# Altium PCB RPi_DAQ_Hat.PcbDoc
Units mm, origin at the board's own origin, x right, y up, seen from the top; angles counter-clockwise.
Board outline 56.5 x 65 mm, 2 copper layers (Top Layer, Bottom Layer); 27 components, 24 nets, 221 pads, 25 vias.
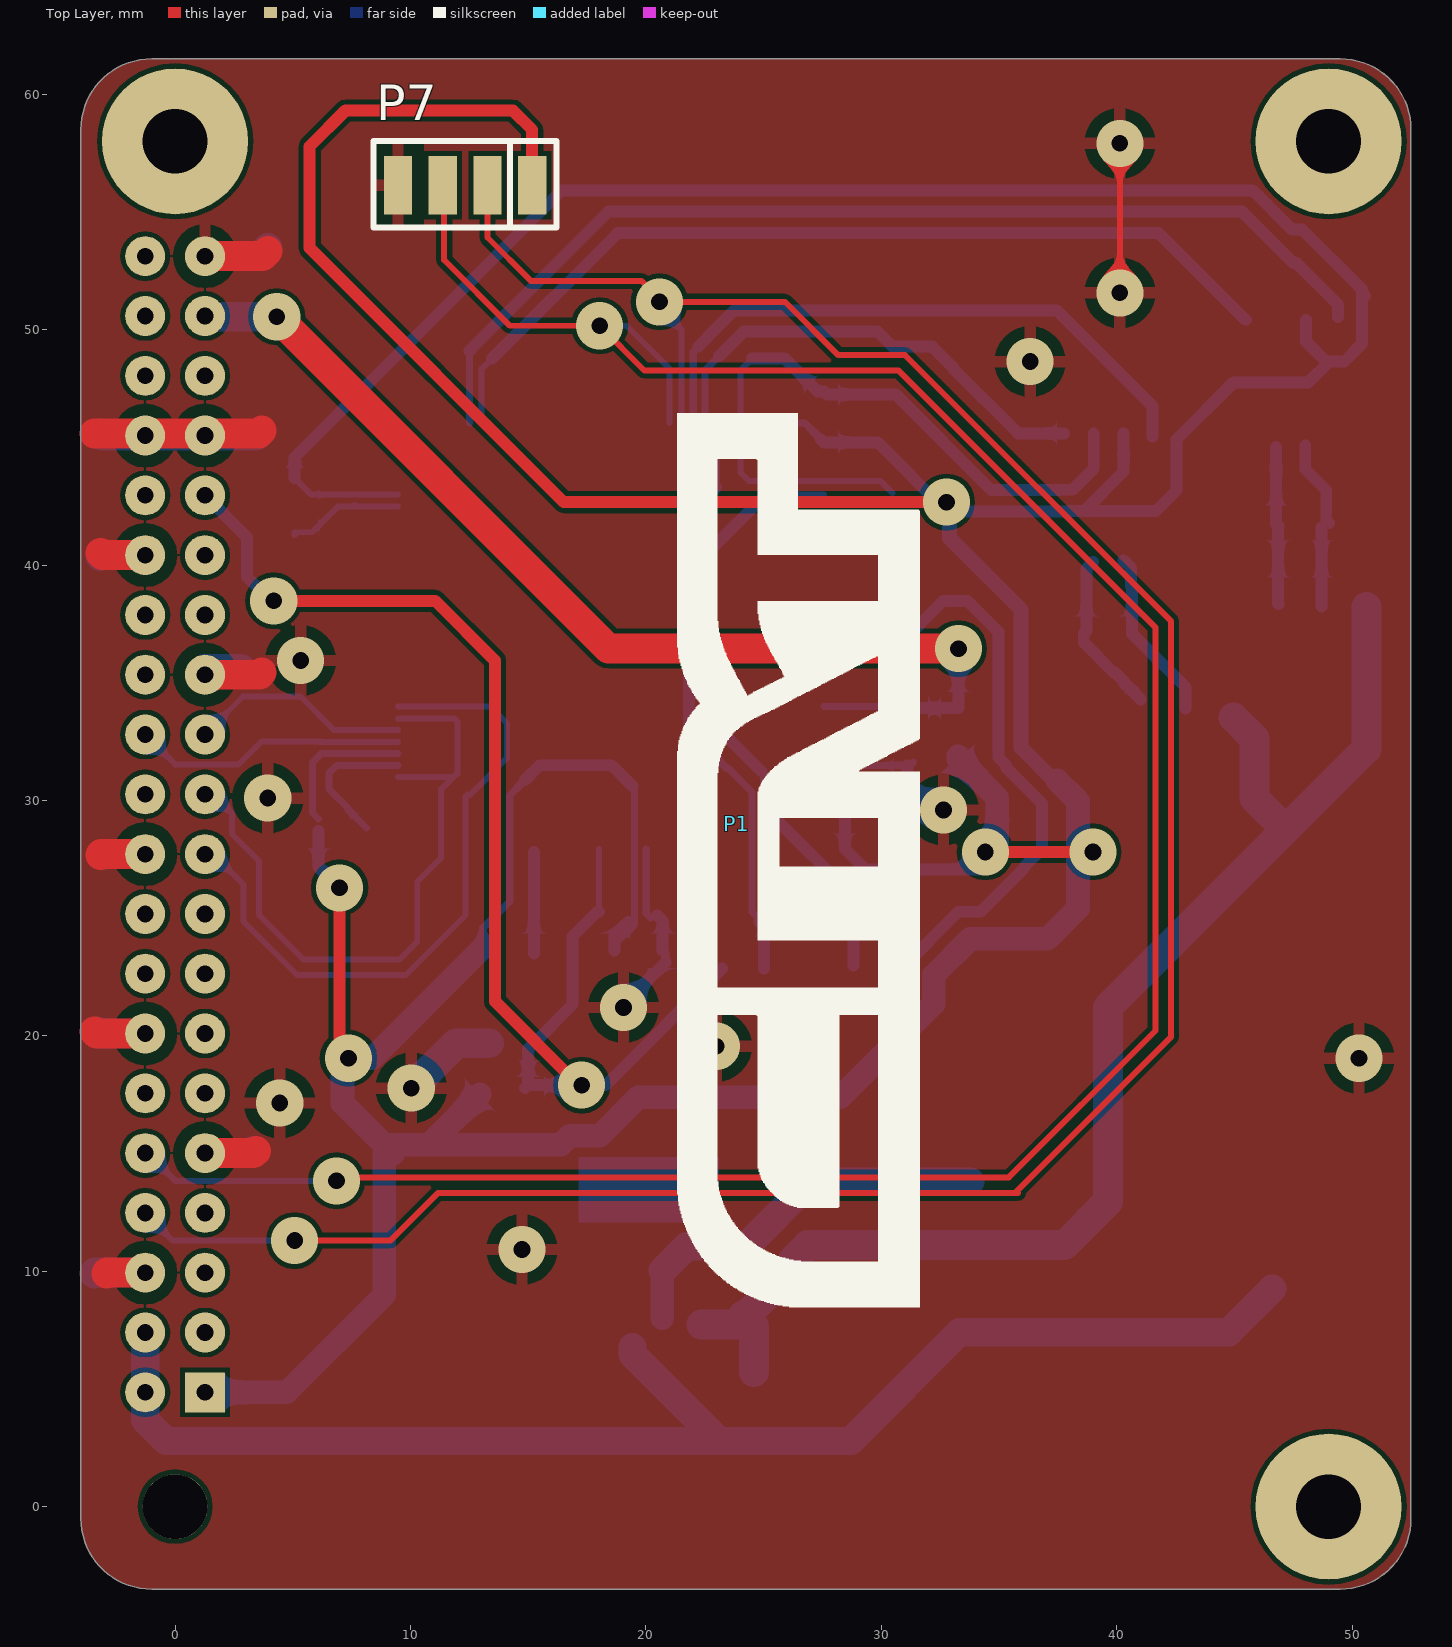
[diagram p0: Top Layer view]
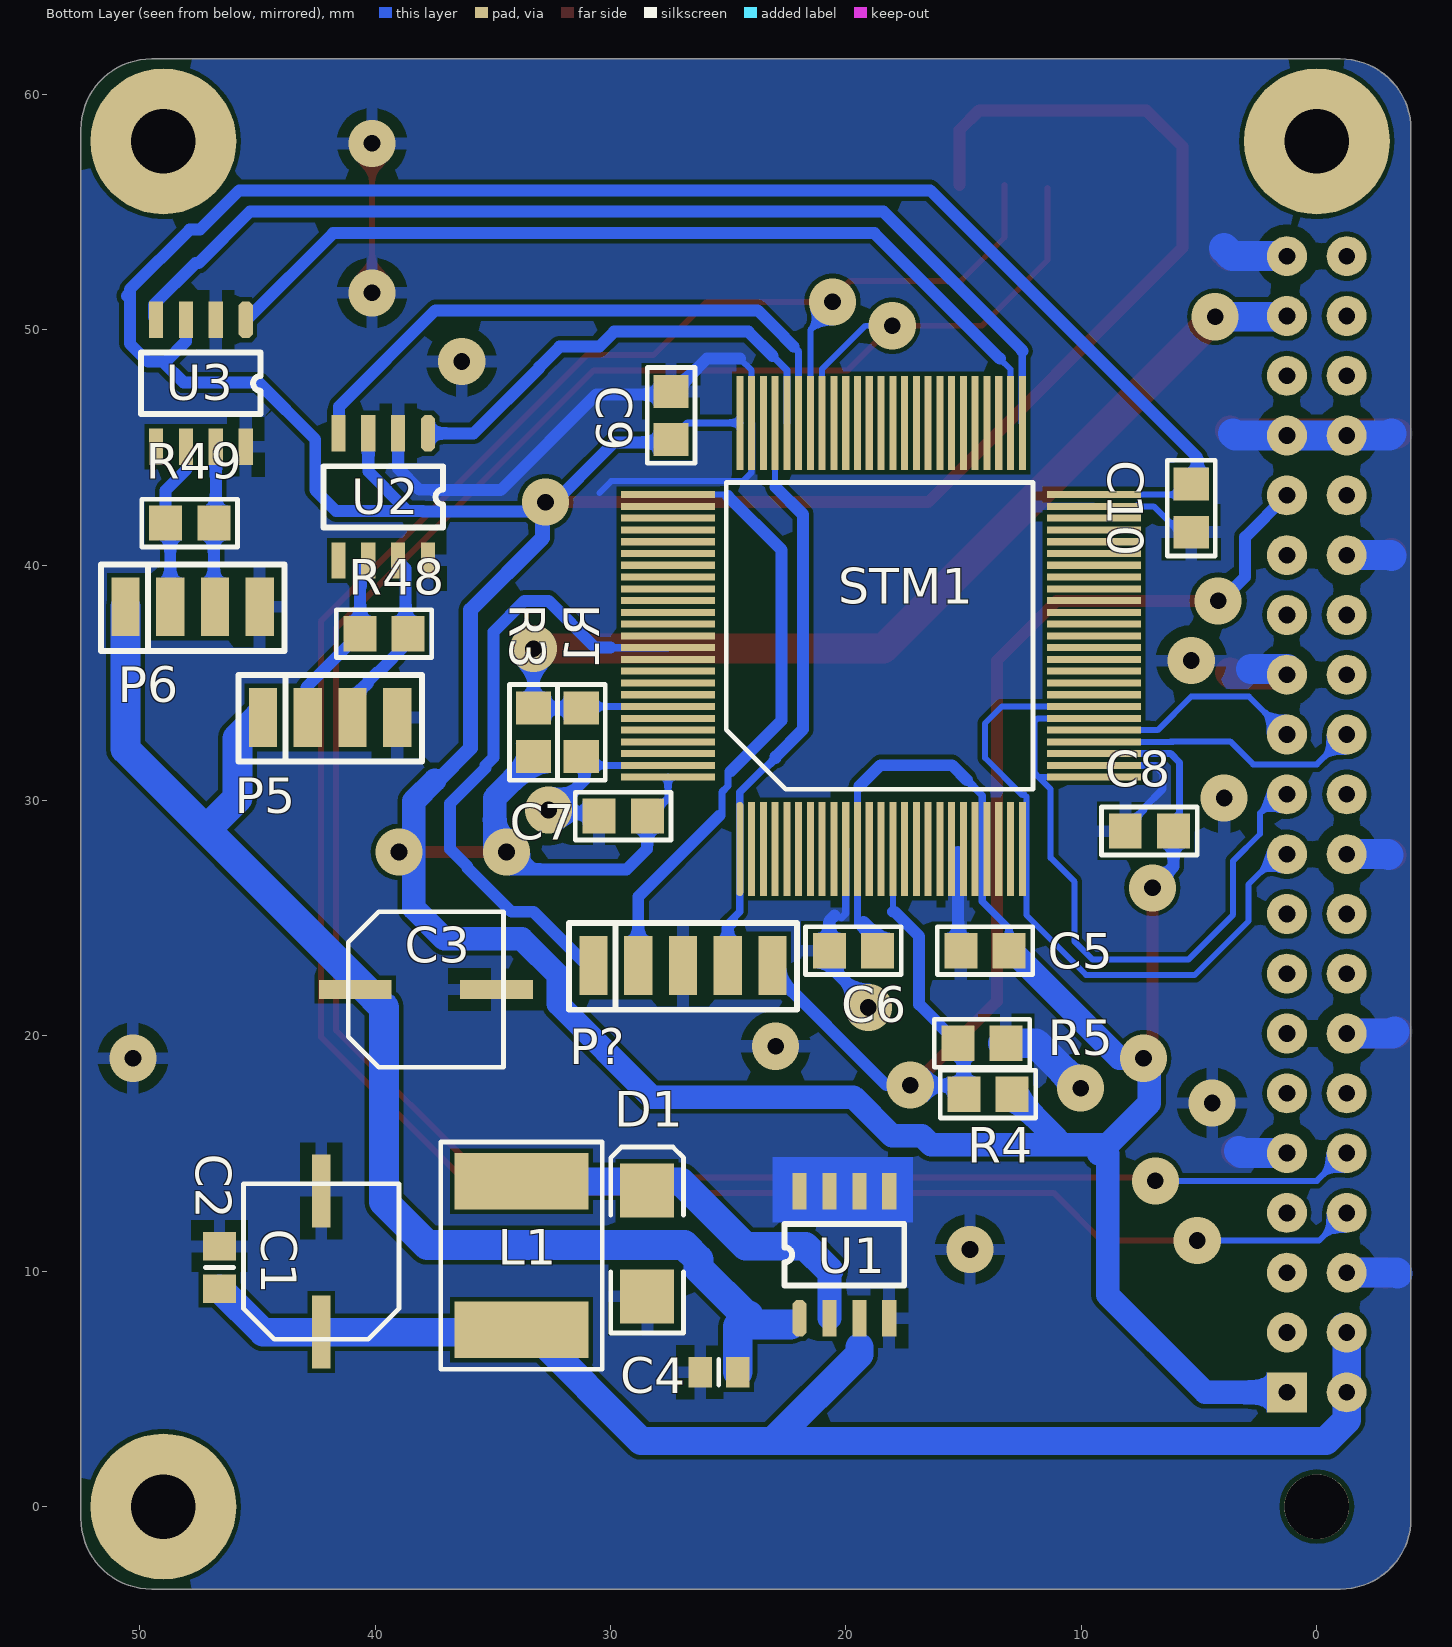
[diagram p1: Bottom Layer view, seen from below]

## Layer stack, top to bottom
Top Solder: solder mask 0.0102, Solder Resist, Dk 3.5
Top Layer: signal copper 0.0356
Dielectric 1: dielectric 0.32, FR-4, Dk 4.8
Bottom Layer: signal copper 0.0356
Bottom Solder: solder mask 0.0102, Solder Resist, Dk 3.5

## Board outline
-4,-0.5 ccw(c-1,-0.5) -1,-3.5 49.5,-3.5 ccw(c49.5,-0.5) 52.5,-0.5 52.5,58.5 ccw(c49.5,58.5) 49.5,61.5 -1,61.5 ccw(c-1,58.5) -4,58.5

## Design rules (kind name [scope] priority, off if disabled: settings)
Clearance Clearance_2 [OnLayer('Bottom Layer')] p1: gap=0.2
Clearance Clearance_1 [IsNamedPolygon('TOP_GND2') vs OnLayer('Top Layer')] p2: gap=0.2
Clearance [Not IsNamedPolygon('TOP_GND2')] p3: gap=0.2
HoleSize [All] p1: absolutevalues=TRUE maxlimit=1000 minlimit=0.025 maxpercent=80.000 minpercent=20.000
MinimumSolderMaskSliver [All] p1 off: minsoldermaskwidth=0.254
PasteMaskExpansion [All] p1 off: expansion=0
PolygonConnect [All] p1: connectstyle=Relief reliefconductorwidth=0.5 reliefentries=4 polygonreliefangle="90 Angle" airgapwidth=0.5
PolygonConnect PolygonConnect_1 [InNamedPolygon('GND-TOP')] p2: connectstyle=Direct reliefconductorwidth=0.254 reliefentries=4 polygonreliefangle="90 Angle" airgapwidth=0.254
RoutingVias [All] p1: holewidth=0.711 width=3 viastyle="Through Hole" minholewidth=0.711 minwidth=2 maxholewidth=0.711 maxwidth=5
SilkToSilkClearance [All] p1 off: silktosilkclearance=0.254
SilkToSolderMaskClearance [IsPad] p1 off: minsilkscreentomaskgap=0.254 clearancetoexposedcopper=TRUE
SolderMaskExpansion [All] p1 off: expansion=0.102
Width [All] p1: maxlimit=100 minlimit=0.254 preferedwidth=0.5
25 further rules are at their usual default settings.

## Classes and differential pairs
component class RPi_DAQ_Hat_MCU: C5 C6 C7 C8 C9 C10 R1 R3 R4 R5 R48 R49 STM1 STM32F107xx U2 U3
component class RPi_DAQ_Hat_Connections: C1 C2 C3 C4 D1 L1 P1 P5 P6 P7 P? U1

## Components (designator, comment, footprint, x,y, rotation, side; value= is the part's Value field where it differs from the comment)
C1 "220uF" "SMD Capacitor 220uF 16V" 42.291,10.414 r0 bottom
C2 "100nF" 6-0805_N 46.609,10.16 r270 bottom
C3 "220uF" "SMD Capacitor 220uF 16V" 37.846,21.971 r90 bottom
C4 "100nF" 6-0805_L 25.4,5.715 r180 bottom
C5 "0.1uF" R0805 14.097,23.622 r0 bottom
C6 "0.1uF" R0805 19.685,23.622 r0 bottom
C7 "0.1uF" R0805 29.464,29.337 r0 bottom
C8 "0.1uF" R0805 7.112,28.702 r0 bottom
C9 "0.1uF" R0805 27.432,46.355 r90 bottom
C10 "0.1uF" R0805 5.334,42.418 r270 bottom
D1 "D Schottky" Diode 28.448,11.176 r270 bottom
L1 "47mH" Inductor 33.782,10.668 r90 bottom
P1 "Raspberry Pi 3" "Rasberry Pi 3 Hat" 23.865,29 r90 top
P5 "Header 2X2H" "SMD 4Wire" 41.91,33.528 r270 bottom
P6 "Header 2X2H" "SMD 4Wire" 47.752,38.227 r270 bottom
P7 "Header 2X2H" "SMD 4Wire" 12.319,56.134 r90 top
P? "ST-Link" "SMD 5Wire" 26.924,22.987 r270 bottom
R1 "10k" R0805 31.242,32.893 r90 bottom
R3 "DNP" R0805 33.274,32.893 r270 bottom
R4 "10k" R0805 13.97,17.526 r180 bottom
R5 "DNP" R0805 14.224,19.685 r0 bottom
R48 "Res3" R0805 39.624,37.084 r180 bottom
R49 "Res3" R0805 47.879,41.783 r180 bottom
STM1 "STM32F107xx" LQFP100 24.511,27.94 r180 bottom locked
U1 "AP1509 - 5V" SOP8 21.971,8.001 r270 bottom
U2 "CAN TRANCEIVER" SOP8 37.753,45.593 r90 bottom
U3 "CAN TRANCEIVER" SOP8 45.5,50.419 r90 bottom

## Footprints (in the part's own frame and the unit in brackets; to place one, negate y for a bottom-side part, rotate by r counter-clockwise, add the part's x,y. Pads: shape width x height; smd on the part's side, far side on the other; paste and mask are expansions set on the pad)
6-0805_L [mm] "Chip Resistor, Body 2.0x1.2mm, IPC High Density"
  rect 1x1.3 smd: 1(-0.8,0) 2(0.8,0)
  silkscreen extent 0,-0.55 0,0.55, body extent -1.07,-0.7 1.07,0.7, height 0.7
6-0805_N [mm] "Chip Resistor, Body 2.0x1.2mm, IPC Medium Density"
  rect 1.2x1.4 smd: 1(-0.9,0) 2(0.9,0)
  silkscreen extent 0,-0.6 0,0.6, body extent -1.07,-0.7 1.07,0.7, height 0.7
Diode [mm] "DO-214-AA/SMB; 2 C-Bend Leads; Body 5.3 x 3.6 mm, inc. leads (LxW)"
  rect 2.3x2.3 smd: 1(2.25,0) 2(-2.25,0)
  silkscreen extent -4.1,-1.55 3.8,1.55, body extent -2.54,-1.02 2.54,1.02, height 2
Inductor [mm]
  rect 2.4x5.7 smd: 1(3.15,0) 2(-3.15,0)
  silkscreen extent -4.83,-3.43 4.83,3.43, body extent -3.15,-3.15 3.15,3.15, height 4.5
LQFP100 [mm]
  oval 0.3x4 smd: 1(0,0)
  rect 0.3x4 smd: 2(0.5,0) 3(1,0) 4(1.5,0) 5(2,0) 6(2.5,0) 7(3,0) 8(3.5,0) 9(4,0) 10(4.5,0) 11(5,0) 12(5.5,0) 13(6,0) 14(6.5,0) 15(7,0) 16(7.5,0) 17(8,0) 18(8.5,0) 19(9,0) 20(9.5,0) 21(10,0) 22(10.5,0) 23(11,0) 24(11.5,0) 25(12,0) 51(12,18.1) 52(11.5,18.1) 53(11,18.1) 54(10.5,18.1) 55(10,18.1) 56(9.5,18.1) 57(9,18.1) 58(8.5,18.1) 59(8,18.1) 60(7.5,18.1) 61(7,18.1) 62(6.5,18.1) 63(6,18.1) 64(5.5,18.1) 65(5,18.1) 66(4.5,18.1) 67(4,18.1) 68(3.5,18.1) 69(3,18.1) 70(2.5,18.1) 71(2,18.1) 72(1.5,18.1) 73(1,18.1) 74(0.5,18.1) 75(0,18.1)
  rect 4x0.3 smd: 26(15.05,3.05) 27(15.05,3.55) 28(15.05,4.05) 29(15.05,4.55) 30(15.05,5.05) 31(15.05,5.55) 32(15.05,6.05) 33(15.05,6.55) 34(15.05,7.05) 35(15.05,7.55) 36(15.05,8.05) 37(15.05,8.55) 38(15.05,9.05) 39(15.05,9.55) 40(15.05,10.05) 41(15.05,10.55) 42(15.05,11.05) 43(15.05,11.55) 44(15.05,12.05) 45(15.05,12.55) 46(15.05,13.05) 47(15.05,13.55) 48(15.05,14.05) 49(15.05,14.55) 50(15.05,15.05) 76(-3.05,15.05) 77(-3.05,14.55) 78(-3.05,14.05) 79(-3.05,13.55) 80(-3.05,13.05) 81(-3.05,12.55) 82(-3.05,12.05) 83(-3.05,11.55) 84(-3.05,11.05) 85(-3.05,10.55) 86(-3.05,10.05) 87(-3.05,9.55) 88(-3.05,9.05) 89(-3.05,8.55) 90(-3.05,8.05) 91(-3.05,7.55) 92(-3.05,7.05) 93(-3.05,6.55) 94(-3.05,6.05) 95(-3.05,5.55) 96(-3.05,5.05) 97(-3.05,4.55) 98(-3.05,4.05) 99(-3.05,3.55) 100(-3.05,3.05)
  silkscreen extent -0.58,2.53 12.45,15.56, body extent -1.9,1.14 13.97,16.76, height 2
R0805 [mm]
  rect 1.4x1.5 smd: 1(-1.025,0) 2(1.025,0)
  silkscreen extent -2.03,-1.02 2.03,1.02, body extent -1.4,-0.76 1.4,0.76, height 1
"Rasberry Pi 3 Hat" [mm]
  round 6.2 hole 2.75: 0(-29,-25.135) 0(29,-25.135) 0(29,23.865)
  round 2.75 hole 2.75 unplated: 0(-29,23.865)
  rect 1.7x1.7 hole 0.71: 1(-24.14,22.595)
  round 1.7 hole 0.71: 2(-24.14,25.135) 3(-21.6,22.595) 4(-21.6,25.135) 5(-19.06,22.595) 6(-19.06,25.135) 7(-16.52,22.595) 8(-16.52,25.135) 9(-13.98,22.595) 10(-13.98,25.135) 11(-11.44,22.595) 12(-11.44,25.135) 13(-8.9,22.595) 14(-8.9,25.135) 15(-6.36,22.595) 16(-6.36,25.135) 17(-3.82,22.595) 18(-3.82,25.135) 19(-1.28,22.595) 20(-1.28,25.135) 21(1.26,22.595) 22(1.26,25.135) 23(3.8,22.595) 24(3.8,25.135) 25(6.34,22.595) 26(6.34,25.135) 27(8.88,22.595) 28(8.88,25.135) 29(11.42,22.595) 30(11.42,25.135) 31(13.96,22.595) 32(13.96,25.135) 33(16.5,22.595) 34(16.5,25.135) 35(19.04,22.595) 36(19.04,25.135) 37(21.58,22.595) 38(21.58,25.135) 39(24.12,22.595) 40(24.12,25.135)
  body extent -32.5,-30.95 54.5,27.4, height 3.7
"SMD 4Wire" [mm]
  rect 2.5x1.2 smd: 1(0,-2.85) 2(0,-0.95) 3(0,0.95) 4(0,2.85)
  silkscreen extent -1.81,-3.89 1.88,3.89
"SMD 5Wire" [mm]
  rect 2.5x1.2 smd: 1(0,-3.8) 2(0,-1.9) 3(0,0) 4(0,1.9) 5(0,3.8)
  silkscreen extent -1.81,-4.84 1.88,4.84
"SMD Capacitor 220uF 16V" [mm]
  rect 0.8x3.1 smd: 1(0,3) 2(0,-3)
  silkscreen extent -3.3,-3.3 3.3,3.3, body extent -3,-3 3,3, height 5
SOP8 [mm]
  oct 1.55x0.6 smd: 1(0,0)
  rect 1.55x0.6 smd: 2(0,1.27) 3(0,2.54) 4(0,3.81) 5(-5.4,3.81) 6(-5.4,2.54) 7(-5.4,1.27) 8(-5.4,0)
  silkscreen extent -4,-0.63 -1.4,4.45, body extent -4.62,-0.62 -0.62,4.38, height 1.75

## Part data
C1 C3: library part "Cap Pol1", "Polarized Capacitor (Radial)"
C2 C4: library part Cap, "Capacitor"
C5 C6 C7 C8 C9 C10: library part CAP_1, "Capacitor"
D1: "Schottky Diode"
L1: library part Inductor, "Inductor"
P1: library part "Header 20X2H", "Header, 20-Pin, Dual row, Right Angle"
P5 P6 P7: "Header, 2-Pin, Dual row, Right Angle"
P?: library part "Header 5", "Header, 5-Pin"
R1 R3 R4 R5: library part Res2, "Resistor"
R48 R49: "Resistor"
U1: library part AP1509
U2 U3: library part 595-SN65HVD233

## Via types
v1: diameter 2, hole 0.711, Top Layer to Bottom Layer, 24 vias
v2: diameter 2/2 (per signal layer), hole 0.711, Top Layer to Bottom Layer, 1 vias

## Nets (pads, with @x,y where several pads share a name; then routed paths per layer and width w, separated by ;. In a path a pad name is that pad's centre, name@x,y a point inside that pad or via, vN(x,y) a via of type N, cw(c..) or ccw(c..) an arc to the next point about the centre after c; other vN are vias at no path point)
3.3V: C5.1 C6.1 C7.1 C8.1 C9.1 C10.1 P1.1 P7.1 R3.2 R4.2 STM1.11 STM1.21 STM1.22 STM1.28 STM1.50 STM1.75 STM1.100 U2.3 U3.3 | length 287.2
  Top Layer w0.508: v1(6.985,26.289) 6.985,19.431 v1@7.239,19.177 ; P7.1 15.169,58.491 14.351,59.309 7.239,59.309 5.715,57.785 5.715,53.467 16.51,42.672 v1(32.766,42.672) ; v1(34.417,27.813) v1(38.989,27.813)
  Bottom Layer w0.254: C10.1@5.207,43.561 5.778,42.99 STM1.50
  Bottom Layer w0.305: C8.1@6.096,29.21 5.836,29.47 5.836,31.617 6.209,31.99 STM1.28 ; C5.1 13.072,23.74 13.072,24.57 14.213,25.711 14.213,30.215 14.986,30.988 ; C6.1@18.796,24.003 19.511,24.718 STM1.11 19.511,30.4 19.304,30.607 ; STM1.75 26.731,46.04 C9.1@27.432,45.339 ; STM1.100 27.561,30.097 C7.1@28.448,29.21
  Bottom Layer w0.508: C10.1@5.08,43.688 5.08,44.577 16.421,55.918 45.773,55.918 47.445,54.246 47.88,54.246 50.419,51.707 50.419,51.562 ; C8.1 6.087,27.187 v1(6.985,26.289) ; 14.866,30.868 15.494,31.496 18.542,31.496 19.431,30.607 ; C6.1 18.66,24.248 19.257,24.845 ; C9.1@27.432,45.339 27.559,45.212 29.845,45.212 v1@32.785,42.272 ; C7.1@28.448,29.337 28.448,29.21 28.448,27.94 29.318,27.07 v1@33.801,27.07 ; v1@33.039,42.272 37.973,42.272 ; 37.973,42.291 38.608,42.291 ; U2.3 40.293,43.976 38.608,42.291 ; U3.3 48.04,49.496 48.895,48.641 ; 50.546,51.435 50.419,51.562 ; 38.608,42.291 41.656,42.291 42.545,43.18 42.545,45.339 44.958,47.752 48.133,47.752 49.022,48.641 49.657,48.641 50.419,49.403 50.419,51.562
  Bottom Layer w0.635: v1@32.893,42.272 32.893,41.148 35.941,38.1 35.941,32.235 37.39,30.786
  Bottom Layer w1: P1.1 4.743,4.86 8.89,9.007 8.89,14.986 9.271,14.986 8.89,15.367 ; 11.04,15.621 R4.2 ; C5.1@13.072,23.74 8.382,19.05 v1(7.366,19.05) 7.112,19.05 7.112,17.145 8.89,15.367 ; R3.2 33.274,31.75 34.925,30.099 v1@34.925,27.813 ; 37.465,30.861 38.354,29.972 38.354,25.419 37.054,24.119 33.771,24.119 32.224,22.572 32.224,21.364 28.26,17.4 19.685,17.4 18.044,15.759 16.772,15.759 16.38,15.367 8.89,15.367
5V: C1.1 C2.2 L1.2 P1.2 P1.4 U1.3 | length 60.4
  Bottom Layer w1.2: P1.4@-1.143,7.62 -1.27,7.493 P1.4 P1.2 -1.27,3.683 -0.381,2.794 23.114,2.794 ; 19.431,6.782 19.431,6.477 23.114,2.794 ; C2.2 44.763,7.414 33.322,7.414 28.702,2.794 23.114,2.794
14V: C3.1 C4.2 P5.1 P6.1 U1.1 | length 57.7
  Bottom Layer w1.27: 22.352,7.747 23.876,7.747 24.194,8.064 ; 24.13,8.128 24.194,8.064 ; C4.2 24.6,7.658 24.194,8.064 ; P5.1@44.958,33.528 45.847,32.639 45.847,30.099 47.117,28.829 ; P6.1 50.602,32.187 39.624,21.209 39.624,12.954 37.781,11.111 26.869,11.111 26.263,10.505 26.263,10.134 24.194,8.064
BOOT: P1.37 R1.2 R3.1 STM1.94 | length 46.8
  Top Layer w1.27: v1(4.318,50.546) 18.415,36.449 v1(33.274,36.449)
  Bottom Layer w0.305: STM1.94 R1.2@31.923,33.99
  Bottom Layer w0.508: R1.2@31.369,33.909 31.378,33.918 R3.1 33.274,36.322 v1@33.401,36.449
  Bottom Layer w1.27: P1.37@1.27,50.673 1.397,50.546 v1(4.318,50.546)
CAN1_H: P5.3 R48.2 U2.7 | length 6.9
  Bottom Layer w0.508: R48.2 38.599,36.712 39.879,35.432 39.931,35.432 40.314,35.049 40.314,34.997 P5.3@41.021,34.29 ; R48.2@38.707,37.192 38.707,39.85 U2.7@38.989,40.132
CAN1_L: P5.2 R48.1 U2.6 | length 7.4
  Bottom Layer w0.508: U2.6 40.609,39.877 40.609,39.116 40.64,39.085 R48.1@40.64,37.084 ; R48.1 42.926,34.807 P5.2@42.926,33.909
CAN1_RX: STM1.70 U2.4 | length 26.2
  Bottom Layer w0.305: STM1.70 22.011,49.062 22.225,49.276
  Bottom Layer w0.508: 22.225,49.276 22.587,49.638 22.587,49.652 23.754,50.819 37.446,50.819 41.529,46.736 U2.4@41.529,45.466
CAN1_TX: STM1.71 U2.1 | length 20
  Bottom Layer w0.305: STM1.71 22.511,48.278 23.114,48.881
  Bottom Layer w0.508: 23.114,48.881 24.144,49.911 29.845,49.911 30.48,49.276 32.165,49.276 33.037,48.404 ; 33.02,48.387 35.814,45.593 U2.1
CAN2_H: P6.3 R49.2 U3.7 | length 6.7
  Bottom Layer w0.508: U3.7 46.77,41.749 R49.2@46.854,41.665 ; P6.3@46.863,38.354 46.854,38.363 R49.2@46.854,41.665 ; R49.2@46.863,41.656 R49.2@46.854,41.665
CAN2_L: P6.2 R49.1 U3.6 | length 7.2
  Bottom Layer w0.5: U3.6@48.006,45.085 48.006,44.069 48.904,43.171 R49.1@48.904,41.901 ; P6.2 R49.1@48.702,41.59 ; R49.1 R49.1@48.904,41.901 ; R49.1@49.022,41.783 R49.1@48.904,41.901
CAN2_RX: STM1.51 U3.4 | length 44.6
  Bottom Layer w0.305: 12.509,49.085 12.511,49.084 STM1.51
  Bottom Layer w0.508: 12.509,49.085 12.554,49.13 12.554,49.158 18.406,55.01 45.32,55.01 47.498,52.832 47.627,52.832 49.403,51.056 U3.4@49.403,50.546
CAN2_TX: STM1.52 U3.1 | length 38.7
  Bottom Layer w0.254: STM1.52 13.011,48.317 13.462,48.768
  Bottom Layer w0.508: 13.462,48.768 18.796,54.102 41.783,54.102 45.466,50.419 U3.1
GND: C1.2 C2.1 C3.2 C4.1 C5.2 C6.2 C7.2 C8.2 C9.2 C10.2 D1.1 P1.6 P1.9 P1.14 P1.20 P1.25 P1.30 P1.33 P1.34 P1.39 P5.4 P6.4 P7.4 P?.3 R1.1 R5.1 STM1.10 STM1.19 STM1.20 STM1.27 STM1.49 STM1.74 STM1.99 U1.4 U1.5 U1.6 U1.7 U1.8 U2.2 U2.8 U3.2 U3.8 | length 116.1
  Top Layer w0.254: v1(40.132,51.562) v1(40.132,57.912)
  Top Layer w1.27: -3.429,20.193 -3.336,20.1 P1.14 ; -3.429,45.593 3.556,45.593 3.683,45.72 ; -3.175,27.686 -3.141,27.72 P1.20 ; -3.175,40.513 -3.082,40.42 P1.30 ; -2.921,9.906 -2.887,9.94 P1.6 ; P1.9 3.336,15.02 3.429,15.113 ; P1.25 3.59,35.34 3.683,35.433 ; P1.39 3.717,53.12 3.937,53.34
  Bottom Layer w0.254: C10.2@5.08,41.275 C10.2@5.198,41.393 ; C10.2@5.08,41.393 C10.2@5.198,41.393 ; STM1.49@7.62,42.545 STM1.49@7.565,42.49 ; STM1.49 STM1.49@7.565,42.49 ; 24.511,48.768 24.011,48.268 STM1.74 24.011,43.934 24.384,43.561 29.972,43.561 30.48,43.053 ; C10.2@5.198,41.393 5.833,41.393 6.93,42.49 STM1.49@7.565,42.49
  Bottom Layer w0.305: C8.2@8.128,28.829 7.339,29.618 7.339,29.681 6.54,30.48 6.54,31.178 6.852,31.49 STM1.27 ; STM1.10 20.011,25.201 20.193,25.019 ; C6.2@20.828,23.114 C6.2@20.828,23.622 ; STM1.99 31.115,31.49 31.236,31.49 R1.1@31.369,31.623
  Bottom Layer w0.508: C5.2@15.24,23.495 15.24,27.813 ; v2(19.05,21.209) 19.05,21.336 C6.2@20.828,23.114 ; 20.479,25.114 20.71,24.883 C6.2 ; 24.511,48.768 25.908,48.768 26.289,48.387 ; 26.308,48.368 27.296,47.38 C9.2 ; C9.2@27.559,47.371 27.686,47.244 30.607,47.244 34.671,43.18 37.578,43.18 37.597,43.199 38.119,43.199 39.023,44.103 U2.2 ; C7.2@30.607,29.464 32.512,29.464 31.115,30.861 R1.1@31.115,31.49
  Bottom Layer w1.27: -3.429,9.906 -3.395,9.94 P1.6 ; -3.302,20.193 -3.209,20.1 P1.14 ; -3.175,40.386 -3.141,40.42 P1.30 ; -3.175,45.593 -3.082,45.5 P1.34 P1.33 3.463,45.5 3.556,45.593 ; -3.048,27.686 -3.014,27.72 P1.20 ; P1.9 3.209,15.02 3.302,15.113 ; P1.25 1.27,35.579 2.794,35.579 ; P1.39 3.59,53.12 3.937,53.467 ; v1(10.033,17.78) 11.938,19.685 R5.1 R5.1@13.335,19.685
  other v1: 14.732,10.922 4.445,17.145 50.292,19.05 22.987,19.558 32.639,29.591 3.937,30.099 5.334,35.941 36.322,48.641
NetD1_2: D1.2 L1.1 U1.2 | length 16.7
  Bottom Layer w1: U1.2 20.701,10.033
  Bottom Layer w1.2: 20.701,10.033 21.733,11.065 24.265,11.065 27.018,13.818 L1.1
RESET: P1.31 P?.5 R4.1 R5.2 STM1.14 | length 57.5
  Top Layer w0.508: v1(4.191,38.481) 11.049,38.481 13.589,35.941 13.589,21.463 v1@17.145,17.907
  Bottom Layer w0.254: 18.011,25.273 STM1.14
  Bottom Layer w0.508: P1.31 3.048,41.182 3.048,39.497 4.064,38.481 v1(4.191,38.481) ; R4.1@14.859,17.78 14.986,17.907 R4.1@14.995,17.907 ; R5.2@15.24,19.685 14.995,19.44 R4.1@14.995,17.907 ; R5.2@15.249,19.694 16.891,21.336 16.891,24.228 17.936,25.273 18.011,25.273 ; P?.5@23.241,22.86 18.288,17.907 v1(17.272,17.907) R4.1@14.995,17.907
SPI_CLK: P1.23 STM1.30 | length 9.5
  Bottom Layer w0.254: P1.23 2.887,34.417 5.334,34.417 6.761,32.99 STM1.30
SPI_MISO: P1.21 STM1.26 STM1.31 | length 29
  Bottom Layer w0.254: P1.21 1.617,30.26 2.413,29.464 2.413,28.575 3.556,27.432 3.556,25.146 5.461,23.241 9.525,23.241 10.287,24.003 10.287,26.543 11.303,27.559 11.303,30.48 11.813,30.99 ; STM1.26 11.813,30.99 ; STM1.31 11.856,33.49 11.988,33.358 ; 11.938,31.115 11.813,30.99 ; 11.988,31.122 11.988,33.274
SPI_MOSI: P1.19 STM1.25 STM1.32 | length 29
  Bottom Layer w0.254: P1.19 1.617,27.72 2.902,26.435 2.902,24.875 5.19,22.587 9.796,22.587 12.334,25.125 12.334,30.158 12.424,30.248 ; STM1.32 13.381,33.99 14.097,33.274 14.097,31.812 12.511,30.226
SPI_NCS: P1.24 STM1.29 | length 11.8
  Bottom Layer w0.254: P1.24 0,31.53 2.701,31.53 3.683,32.512 6.223,32.512 ; 6.118,32.49 STM1.29
SWCLK: P?.2 STM1.76 | length 25.9
  Bottom Layer w0.254: 25.019,42.926 25.083,42.99 STM1.76
  Bottom Layer w0.305: 25.009,31.242 25.009,30.611 25.273,30.347 25.273,29.337
  Bottom Layer w0.508: 24.892,31.242 22.733,33.401 22.733,40.64 25.019,42.926 ; 25.4,29.337 28.824,25.913 P?.2
SWDIO: P?.4 STM1.1 STM1.72 | length 25.2
  Bottom Layer w0.254: 22.987,43.307 23.011,43.331 STM1.72
  Bottom Layer w0.305: 22.987,31.809 23.461,31.335 ; 23.495,31.369 24.511,30.353 STM1.1 24.511,25.273 25.019,24.765
  Bottom Layer w0.508: 22.987,31.809 22.987,31.863 21.825,33.025 21.825,42.145 22.987,43.307 ; 24.815,24.842 25.019,24.638 P?.4@25.019,22.86
SWO: P?.1 STM1.89 | length 26.9
  Bottom Layer w0.305: STM1.89 30.013,36.49
  Bottom Layer w0.508: 30.013,36.49 30.648,36.49 ; 30.607,36.449 30.648,36.49 ; P?.1@30.861,22.86 33.274,25.273 34.216,25.273 36.071,27.128 36.071,27.181 36.83,27.94 36.83,29.864 35.306,31.388 35.306,31.496 34.97,31.832 34.97,37.166 33.655,38.481 32.639,38.481 30.648,36.49
USART1_RX: P1.8 P7.2 STM1.69 | length 109.3
  Top Layer w0.254: v1(5.08,11.303) 9.144,11.303 11.176,13.335 35.687,13.335 ; P7.2 13.269,53.914 15.113,52.07 19.812,52.07 v1@20.574,51.308 ; v1(20.574,51.181) 25.908,51.181 28.175,48.914 31.005,48.914 42.31,37.609 42.31,19.958 35.687,13.335 ; 35.814,13.335 35.687,13.335
  Bottom Layer w0.254: P1.8 -0.093,11.303 v1(5.08,11.303) v1@5.461,11.303 ; v1(20.574,51.181) 20.574,50.927 21.511,49.99 STM1.69
USART1_TX: P1.10 P7.3 STM1.68 | length 108.9
  Top Layer w0.254: v1@6.858,13.97 6.877,13.989 35.416,13.989 41.656,20.229 41.656,37.338 30.734,48.26 19.939,48.26 v1(18.034,50.165) 14.224,50.165 11.43,52.959 P7.3@11.43,56.007
  Bottom Layer w0.254: P1.10 -1.177,15.02 0,13.843 v1(6.858,13.843) ; v1(18.034,50.165) 19.177,50.165 21.011,48.331 STM1.68
pads on no net: P1.0 P1.3 P1.5 P1.7 P1.11 P1.12 P1.13 P1.15 P1.16 P1.17 P1.18 P1.22 P1.26 P1.27 P1.28 P1.29 P1.32 P1.35 P1.36 P1.38 P1.40 STM1.2 STM1.3 STM1.4 STM1.5 STM1.6 STM1.7 STM1.8 STM1.9 STM1.12 STM1.13 STM1.15 STM1.16 STM1.17 STM1.18 STM1.23 STM1.24 STM1.33 STM1.34 STM1.35 STM1.36 STM1.37 STM1.38 STM1.39 STM1.40 STM1.41 STM1.42 STM1.43 STM1.44 STM1.45 STM1.46 STM1.47 STM1.48 STM1.53 STM1.54 STM1.55 STM1.56 STM1.57 STM1.58 STM1.59 STM1.60 STM1.61 STM1.62 STM1.63 STM1.64 STM1.65 STM1.66 STM1.67 STM1.73 STM1.77 STM1.78 STM1.79 STM1.80 STM1.81 STM1.82 STM1.83 STM1.84 STM1.85 STM1.86 STM1.87 STM1.88 STM1.90 STM1.91 STM1.92 STM1.93 STM1.95 STM1.96 STM1.97 STM1.98 U2.5 U3.5

## Polygon pours and split planes (outlines as drawn)
GND on Bottom Layer "GND_L02_P004" (solid, remove dead copper, pour order 4): -4,-0.5 ccw(c-1,-0.5) -1,-3.5 49.5,-3.5 ccw(c49.5,-0.5) 52.5,-0.5 52.5,58.5 ccw(c49.5,58.5) 49.5,61.5 -1,61.5 ccw(c-1,58.5) -4,58.5
GND on Mechanical 15 "GND" (none): -4,-0.5 -4,58.5 cw(c-1,58.5) -1,61.5 49.5,61.5 cw(c49.5,58.5) 52.5,58.5 52.5,-0.5 cw(c49.5,-0.5) 49.5,-3.5 -1,-3.5 cw(c-1,-0.5)
GND on Top Layer "GND-TOP" (solid, pour order 5): -4,-0.5 -4,58.5 cw(c-1,58.5) -1,61.5 49.5,61.5 cw(c49.5,58.5) 52.5,58.5 52.5,-0.5 cw(c49.5,-0.5) 49.5,-3.5 -1,-3.5 cw(c-1,-0.5)

## Other copper
Bottom Layer:
  rectangle net GND: 17.145,12.065 23.114,14.859

## Silkscreen, mask and mechanical layers (free items; w line width, h text height)
Top Overlay:
  drawing of 1177 lines, arcs and shapes, not listed
Mechanical 15:
  lines w1: -1,-3.5 cw(c-1,-0.5) -4,-0.5 -4,58.5 cw(c-1,58.5) -1,61.5 ; -1,-3.5 49.5,-3.5 ; -1,-3.5 -1,-3.5 ; -1,61.5 -1,61.5 ; -1,61.5 49.5,61.5 ; 49.5,-3.5 ccw(c49.5,-0.5) 52.5,-0.5 52.5,58.5 ccw(c49.5,58.5) 49.5,61.5 ; 49.5,-3.5 49.5,-3.5 ; 49.5,61.5 49.5,61.5